# Altium PCB Pulsed_IR_LED.PcbDoc
Units mm, origin at the board's own origin, x right, y up, seen from the top; angles counter-clockwise.
Board outline 65 x 30 mm, 2 copper layers (Top Layer, Bottom Layer); 14 components, 7 nets, 39 pads, 76 vias.
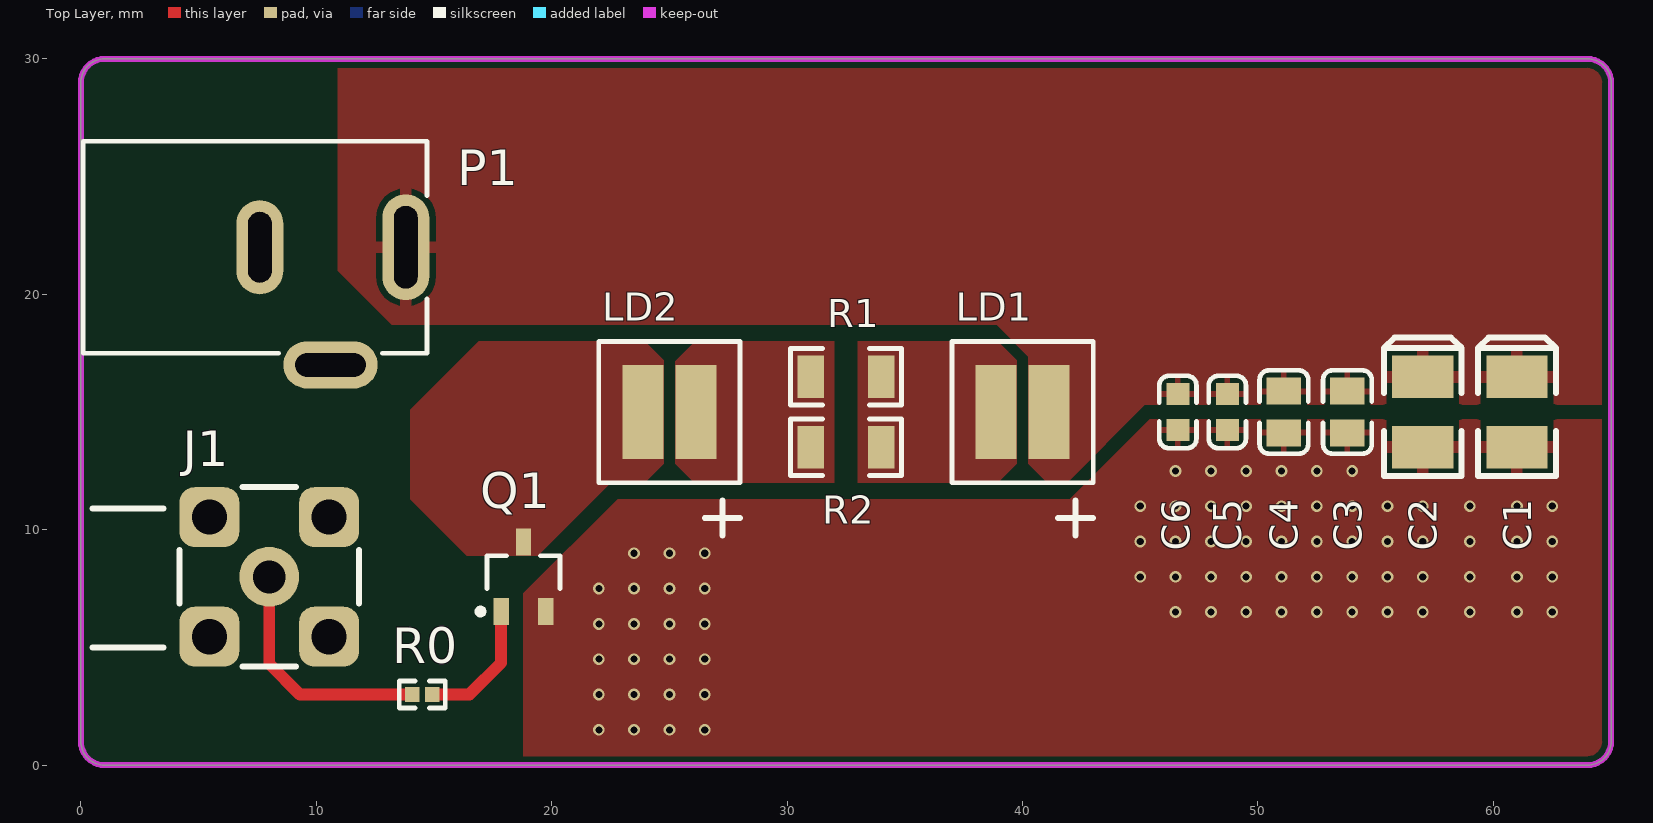
[diagram p0: Top Layer view]
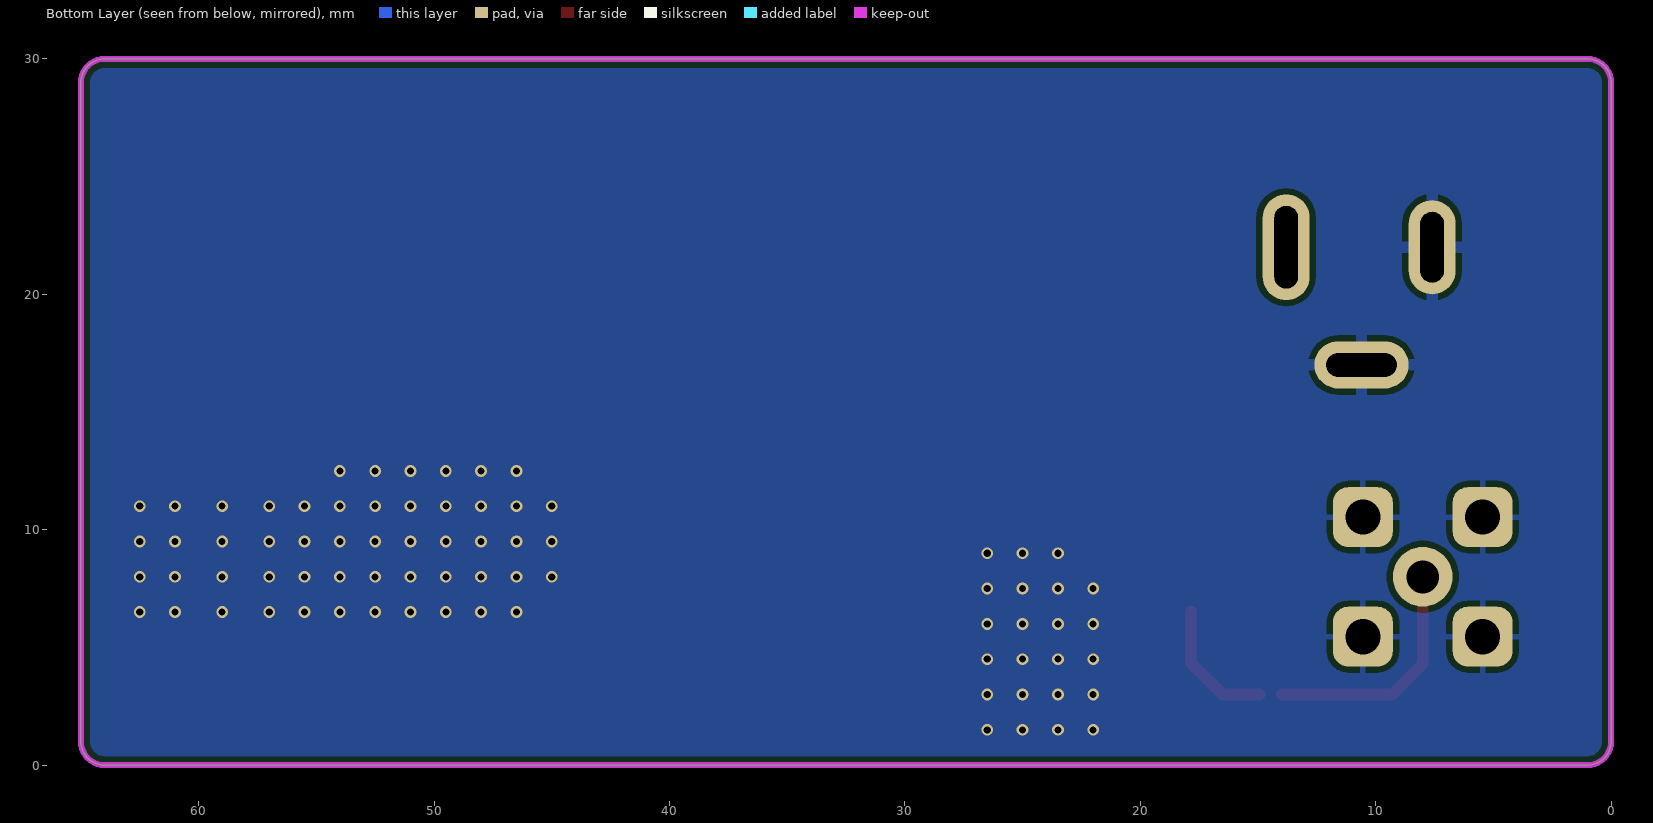
[diagram p1: Bottom Layer view, seen from below]
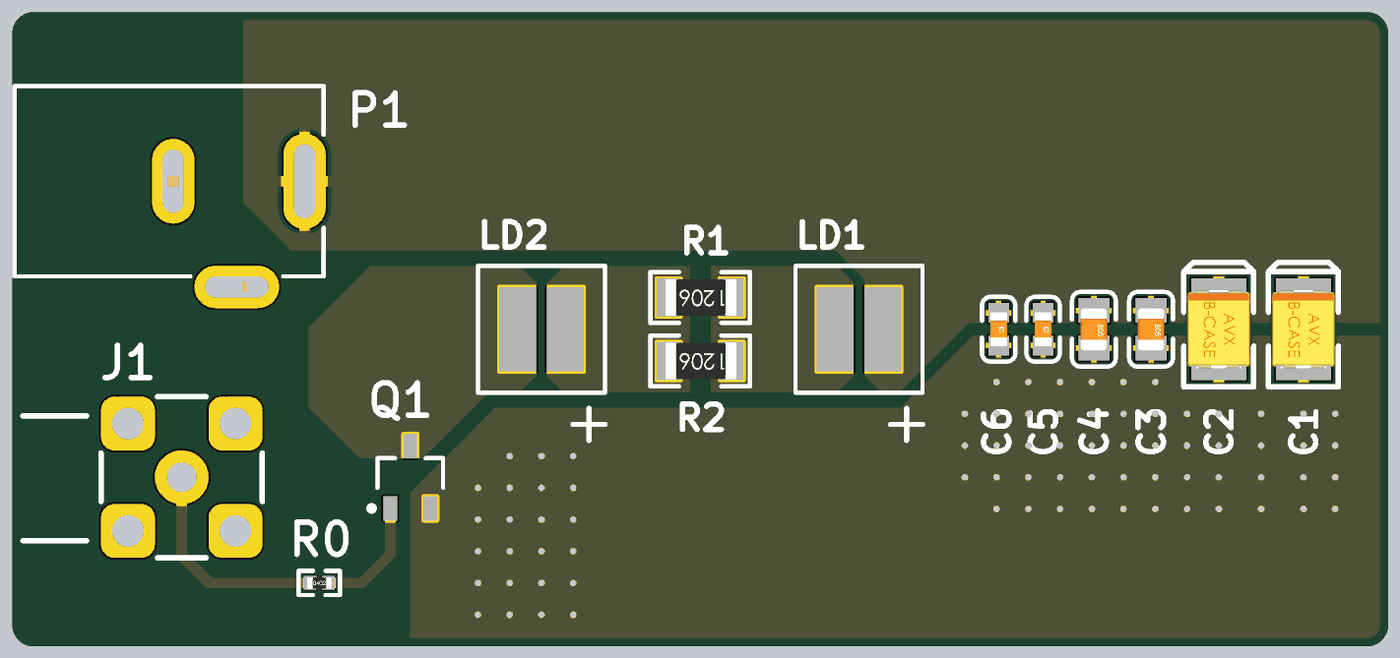
[diagram p2: 3D render of the assembled board from above, using the file's embedded part models]

## Layer stack, top to bottom
Top Solder: solder mask 0.0102, Solder Resist, Dk 3.5
Top Layer: signal copper 0.0356
Dielectric 1: dielectric 0.32, FR-4, Dk 4.8
Bottom Layer: signal copper 0.0356
Bottom Solder: solder mask 0.0102, Solder Resist, Dk 3.5

## Board outline
0,1 0,29 cw(c1,29) 1,30 64,30 cw(c64,29) 65,29 65,1 cw(c64,1) 64,0 1,0 cw(c1,1)

## Design rules (kind name [scope] priority, off if disabled: settings)
Clearance [All] p1: gap=0.254 ignorepadtopadclearanceinfootprint=TRUE except(0: Arc-Hole Track-Hole SMDPad-Hole THPad-Hole Via-Hole Fill-Hole Poly-Hole Region-Hole Text-Hole)
HoleSize [All] p1: absolutevalues=TRUE maxlimit=5 minlimit=0.3 maxpercent=80.000 minpercent=20.000
MinimumSolderMaskSliver [All] p1: minsoldermaskwidth=0.1
PolygonConnect [All] p1: connectstyle=Relief reliefconductorwidth=0.254 reliefentries=4 polygonreliefangle="90 Angle" airgapwidth=0.254
RoutingVias [All] p1: holewidth=0.3 width=0.5 viastyle="Through Hole" minholewidth=0.3 minwidth=0.5 maxholewidth=4 maxwidth=5
SilkToSolderMaskClearance [IsPad] p1: minsilkscreentomaskgap=0.1 clearancetoexposedcopper=TRUE
SolderMaskExpansion [All] p1: expansion=0.102 istentingtop=FALSE
Width [All] p1: maxlimit=2 minlimit=0.2 preferedwidth=0.254
27 further rules are at their usual default settings.

## Components (designator, comment, footprint, x,y, rotation, side; value= is the part's Value field where it differs from the comment)
C1 "100uF" CASE-B_3528 61,15 r90 top
C2 "100uF" CASE-B_3528 57,15 r90 top
C3 "10uF" 0805_C 53.8,15 r270 top
C4 "10uF" 0805_C 51.1,15 r270 top
C5 "100nF" 0603_C 48.7,15 r270 top
C6 "100nF" 0603_C 46.6,15 r270 top
J1 "SMA_connector" SMA_header 8,8 r0 top
LD1 "G3535N1VIRV2U12-850" 3535VIR 40,15 r180 top
LD2 "G3535N1VIRV2U12-850" 3535VIR 25,15 r180 top
P1 "PWR2.5" KLD-0202 0.102,22 r0 top
Q1 "AO3400A" SOT-23-3L 18.8,8 r270 top
R0 "51Ω (51R0) ±1%" 0402_R 14.5,3 r0 top
R1 "1Ω" 1206_R 32.5,16.5 r180 top
R2 "1Ω" 1206_R 32.5,13.5 r180 top

## Footprints (in the part's own frame and the unit in brackets; to place one, negate y for a bottom-side part, rotate by r counter-clockwise, add the part's x,y. Pads: shape width x height; smd on the part's side, far side on the other; paste and mask are expansions set on the pad)
0402_R [mm]
  rect 0.6x0.65 smd mask+0.051: 1(-0.425,0) 2(0.425,0)
  silkscreen extent -0.97,-0.58 0.97,0.58, body extent -0.57,-0.27 0.58,0.28, height 0.41
0603_C [mm]
  rect 0.93x0.98 smd: 1(-0.77,0) 2(0.77,0)
  silkscreen extent -1.53,-0.79 1.54,0.79, body extent -0.8,-0.4 0.8,0.4, height 0.3
0805_C [mm]
  rect 1.16x1.47 smd: 1(-0.89,0) 2(0.89,0)
  silkscreen extent -1.77,-1.04 1.77,1.04, body extent -1,-0.62 1,0.63, height 0.77
1206_R [mm]
  rect 1.13x1.8 smd: 1(-1.49,0) 2(1.49,0)
  silkscreen extent -2.36,-1.2 2.35,1.2, body extent -1.7,-0.86 1.65,0.87, height 0.85
3535VIR [mm]
  rect 1.75x4 smd: A(-1.125,0) K(1.125,0)
  silkscreen extent -3,-3 3,5.25, body extent -1.75,-1.75 1.75,1.75, height 1.35
CASE-B_3528 [mm]
  rect 1.8x2.6 smd: 1(1.5,0) 2(-1.5,0)
  silkscreen extent -2.73,-1.65 3.16,1.65, body extent -1.85,-1.47 1.85,1.46, height 2.03
KLD-0202 [mm] "DC Power Jack, 2.5mm, KLD Series, PCB Mount"
  oval 2x4.5 hole 1 slot 3.5 at 90 deg: 1(13.7,0)
  round 1.5 all layers, no hole: 1A(13.7,-1.25) 1B(13.7,1.25) 2A(7.5,-1) 2B(7.5,1) 3A(9.5,-5) 3B(11.5,-5)
  oval 2x4 hole 1 slot 3 at 90 deg: 2(7.5,0)
  oval 4x2 hole 1 slot 3 at 0 deg: 3(10.5,-5)
  silkscreen extent 0,-4.5 14.6,4.5
SMA_header [mm]
  round 2.54 hole 1.4: 1(0,0)
  rrect50% 2.54x2.54 hole 1.5: 2(-2.54,2.54) 3(-2.54,-2.54) 4(2.54,-2.54) 5(2.54,2.54)
  silkscreen extent -3.81,-3.81 3.81,3.81
SOT-23-3L [mm] "http://www.aosmd.com/res/packaging_information/SOT-23-3L.pdf"
  rect 1.15x0.65 smd: 1(1.475,-0.95) 2(1.475,0.95) 3(-1.475,0)
  silkscreen extent -0.9,-1.95 1.6,1.55, body extent -0.9,-1.55 0.9,1.55, height 1.25

## Part data
C1 C2: library part "3528 100uF (107) 10% 6.3V", "钽电容", Package=3528, SuppliersPartNumber=C16133, ComponentLink1Description=供应商链接, ComponentLink1URL=http://www.szlcsc.com/product/details_16815.html, Supplier=LC
C3 C4: library part "0805 10uF (106) 10% 25V", "贴片电容", Package=0805, SuppliersPartNumber=C15850, ComponentLink1Description=供应商链接, ComponentLink1URL=http://www.szlcsc.com/product/details_16532.html, Supplier=LC
C5 C6: library part "0603 100nF (104) 10% 50V", "贴片电容", Package=0603, SuppliersPartNumber=C14663, ComponentLink1Description=供应商链接, ComponentLink1URL=http://www.szlcsc.com/product/details_15331.html, Supplier=LC
P1: "Low Voltage Power Supply Connector", ComponentLink1Description="Manufacturer Link", ComponentLink1URL=http://domino.kycon.com/internet/Products.html, DatasheetDocument=09-May-2002, Published=17-Dec-2003, Publisher="Altium Limited"
Q1: library part "AO3400A N道沟 X0YV1T SOT-23", "MOS(场效应管)", Package=SOT-23, SuppliersPartNumber=C20917, ComponentLink1Description=供应商链接, ComponentLink1URL=http://www.szlcsc.com/product/details_21629.html, Supplier=LC
R0: library part "0402 51Ω (51R0) 1%", "贴片电阻", Package=0402, SuppliersPartNumber=C25125, ComponentLink1Description=供应商链接, ComponentLink1URL=http://www.szlcsc.com/product/details_25868.html, Supplier=LC
R1 R2: library part "1206 1Ω (1R00) 1%", "贴片电阻", Package=1206, SuppliersPartNumber=C17928, ComponentLink1Description=供应商链接, ComponentLink1URL=http://www.szlcsc.com/product/details_18616.html, Supplier=LC

## Via types
v1: diameter 0.5, hole 0.3, Top Layer to Bottom Layer, tented both sides, 76 vias

## Nets (pads, with @x,y where several pads share a name; then routed paths per layer and width w, separated by ;. In a path a pad name is that pad's centre, name@x,y a point inside that pad or via, vN(x,y) a via of type N, cw(c..) or ccw(c..) an arc to the next point about the centre after c; other vN are vias at no path point)
+5: C1.1 C2.1 C3.1 C4.1 C5.1 C6.1 LD1.A P1.1 P1.1A P1.1B
Drain: LD2.K Q1.3
Gate_Drive: Q1.1 R0.2 | length 5.7
  Top Layer w0.508: R0.2 16.5,3 17.85,4.35 Q1.1
GND: C1.2 C2.2 C3.2 C4.2 C5.2 C6.2 J1.2 J1.3 J1.4 J1.5 P1.2 P1.2A P1.2B P1.3 P1.3A P1.3B Q1.2
  other v1: 22,1.5 23.5,1.5 25,1.5 26.5,1.5 22,3 23.5,3 25,3 26.5,3 22,4.5 23.5,4.5 25,4.5 26.5,4.5 22,6 23.5,6 25,6 26.5,6 46.5,6.5 48,6.5 49.5,6.5 51,6.5 52.5,6.5 54,6.5 55.5,6.5 57,6.5 59,6.5 61,6.5 62.5,6.5 22,7.5 23.5,7.5 25,7.5 26.5,7.5 45,8 46.5,8 48,8 49.5,8 51,8 52.5,8 54,8 55.5,8 57,8 59,8 61,8 62.5,8 23.5,9 25,9 26.5,9 45,9.5 46.5,9.5 48,9.5 49.5,9.5 51,9.5 52.5,9.5 54,9.5 55.5,9.5 57,9.5 59,9.5 61,9.5 62.5,9.5 45,11 46.5,11 48,11 49.5,11 51,11 52.5,11 54,11 55.5,11 57,11 59,11 61,11 62.5,11 46.5,12.5 48,12.5 49.5,12.5 51,12.5 52.5,12.5 54,12.5
R+: LD1.K R1.1 R2.1
R-: LD2.A R1.2 R2.2
Signal_In: J1.1 R0.1 | length 10.2
  Top Layer w0.508: J1.1 8,4.3 9.3,3 R0.1@13.975,3

## Polygon pours and split planes (outlines as drawn)
Drain on Top Layer "GND" (solid, pour order 5): 23.95,12 22.5,12 19.4,8.9 16.4,8.9 14,11.3 14,15.1 16.9,18 23.95,18 24.75,17.2 24.75,12.8
+5 on Top Layer "GND" (solid, pour order 3): 40.25,12.8 41.05,12 41.9,12 45.2,15.3 65,15.3 65,30 10.9,30 10.9,21 13.2,18.7 38.9,18.7 40.25,17.35
R- on Top Layer "GND" (solid, pour order 1): 32,18 32,12 26.05,12 25.25,12.8 25.25,17.15 26.1,18
R+ on Top Layer "GND" (solid, pour order 0): 33,18 33,12 38.95,12 39.75,12.8 39.75,17.2 38.95,18
GND on Top Layer "GND" (solid, pour order 4): 65,14.7 45.4,14.7 42,11.3 22.8,11.3 18.8,7.3 18.8,0 65,0
GND on Bottom Layer "GND" (solid, pour order 2): 0,0 65,0 65,30 0,30

## Keep-outs
Keep-Out Layer:
  the board outline again, w0.254

## Silkscreen, mask and mechanical layers (free items; w line width, h text height)
Top Overlay:
  lines w0.254: 0.5,5 3.5,5 ; 0.5,10.9 3.5,10.9
Mechanical 1:
  the board outline again, w0.254

## Text inside footprints (layer, text, board x,y; h text height)
P1: Mechanical 1 "Mech 2 - Clearance, move to internal plane if present" at 0.388,27.066 h0.3; Mechanical 1 "Mech 1 - Slot cut-out" at 0.388,27.566 h0.3; Mechanical 1 "Assign keep-out area to slot" at 0.388,28.566 h0.3; Mechanical 1 "Alert PCB fab to slot details" at 0.388,28.066 h0.3